# Altium PCB PCB1.PcbDoc
Units mm, origin at the board's own origin, x right, y up, seen from the top; angles counter-clockwise.
Board outline 100 x 20 mm, 2 copper layers (Top Layer, Bottom Layer), stack 1.535 mm thick; 28 components, 52 nets, 46 pads, 14 vias.
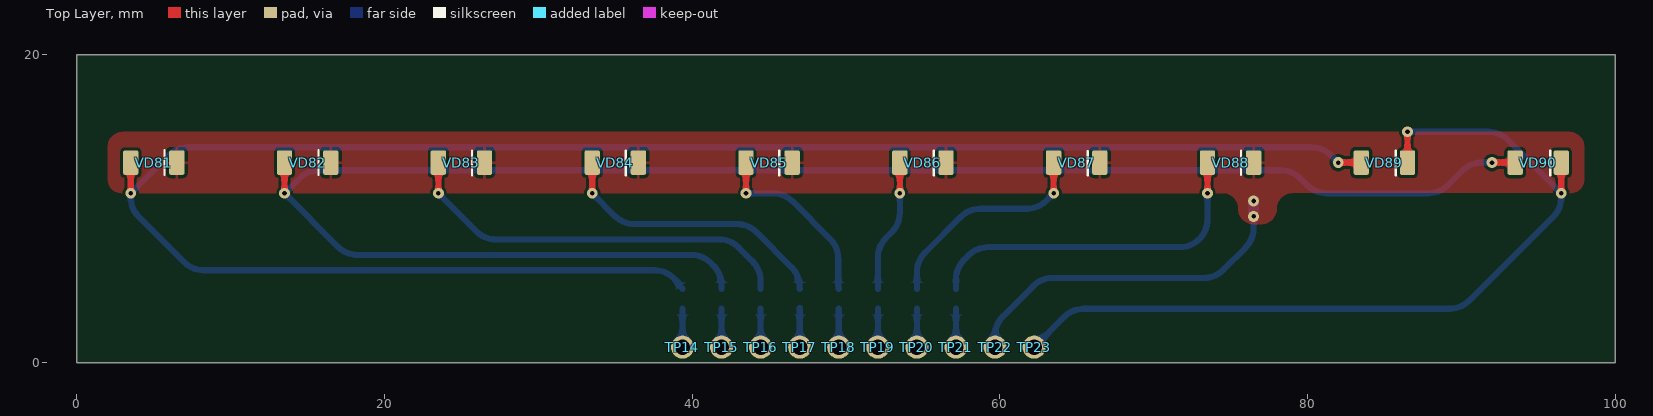
[diagram p0: Top Layer view]
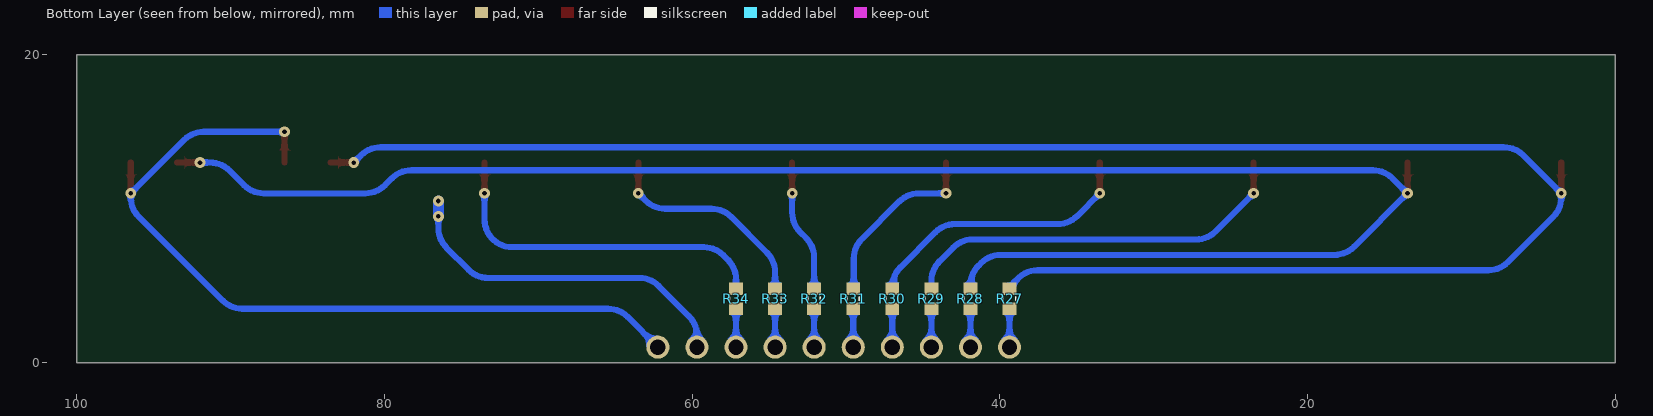
[diagram p1: Bottom Layer view, seen from below]
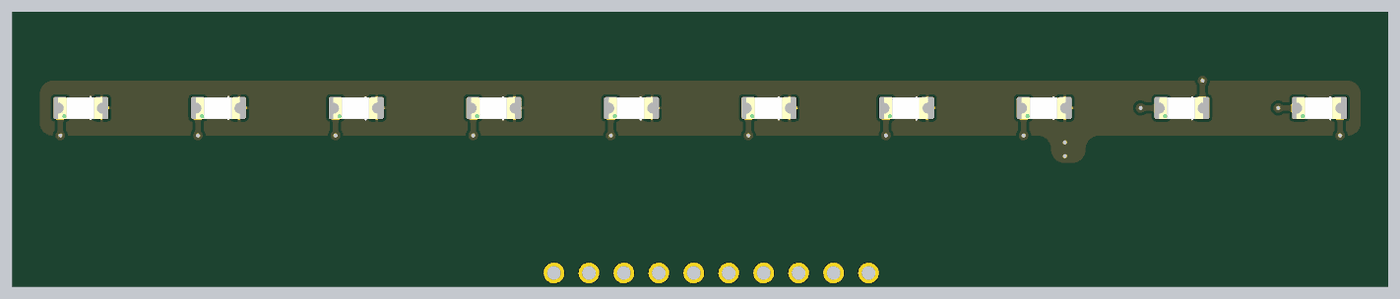
[diagram p2: 3D render of the assembled board from above, using the file's embedded part models]
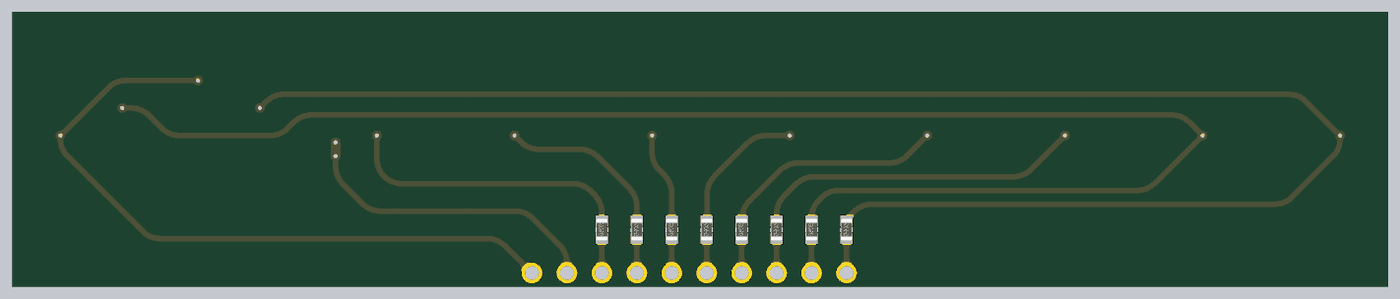
[diagram p3: 3D render of the assembled board from below, using the file's embedded part models]

## Layer stack, top to bottom
Top Solder: solder mask 0.0254, SM-001, Dk 4
Top Layer: signal copper 0.018
Dielectric 1: core 1.4986, Core-043, Dk 4.3
Bottom Layer: signal copper 0.018
Bottom Solder: solder mask 0.0254, SM-001, Dk 4

## Board outline
0,0 100,0 100,20 0,20

## Design rules (kind name [scope] priority, off if disabled: settings)
AcuteAngle [All] p1: minimum=3.50000000000000E+0001 checktracksonly=FALSE
BoardOutlineClearance "BoardOutlineClearance 1" [All] p1: gap=0.25 ignorepadtopadclearanceinfootprint=FALSE except(0: Arc-SplitContinuation Track-SplitContinuation SMDPad-SplitContinuation THPad-SplitContinuation Via-SplitContinuation Fill-SplitContinuation Poly-SplitContinuation Region-SplitContinuation Text-SplitContinuation) // Milling
BoardOutlineClearance "BoardOutlineClearance 2" [All] p2: gap=0.4 ignorepadtopadclearanceinfootprint=FALSE except(0: Arc-SplitContinuation Track-SplitContinuation SMDPad-SplitContinuation THPad-SplitContinuation Via-SplitContinuation Fill-SplitContinuation Poly-SplitContinuation Region-SplitContinuation Text-SplitContinuation) // V-Cut
Clearance "Clearance-1 1 Oz" [All] p1: gap=0.2 ignorepadtopadclearanceinfootprint=TRUE except(0.25: Arc-Hole Track-Hole SMDPad-Hole THPad-Hole Via-Hole Fill-Hole Poly-Hole Region-Hole Text-Hole) // Standart
Clearance "Clearance-1 1/2 Oz" [All] p2: gap=0.125 ignorepadtopadclearanceinfootprint=FALSE except(0.2: Arc-Fill Arc-Poly Track-Fill Track-Poly SMDPad-SMDPad SMDPad-Fill SMDPad-Poly THPad-Fill THPad-Poly Via-Fill Via-Poly Fill-Fill Fill-Poly Poly-Poly Poly-Region Poly-Text; 0.25: Arc-Hole Track-Hole SMDPad-Hole THPad-Hole Via-Hole Fill-Hole Poly-Hole Region-Hole Text-Hole) // Standart
ComponentClearance [All] p1: gap=0.254 collisioncheckmode=3 verticalgap=0.254 showdistances=FALSE donotcheckwithout3dbody=TRUE
DiffPairsRouting "DiffPairsRouting 1 Oz" [All] p1: maxlimit=0.254 minlimit=0.2 mostfreqgap=0.254 toplayer_minwidth=0.2 toplayer_maxwidth=0.381 toplayer_prefwidth=0.381 bottomlayer_minwidth=0.2 bottomlayer_maxwidth=0.381 bottomlayer_prefwidth=0.381 maxuncoupledlength=12.7
DiffPairsRouting "DiffPairsRouting 1/2 Oz" [All] p2: maxlimit=0.254 minlimit=0.1 mostfreqgap=0.254 toplayer_minwidth=0.1 toplayer_maxwidth=0.381 toplayer_prefwidth=0.381 bottomlayer_minwidth=0.1 bottomlayer_maxwidth=0.381 bottomlayer_prefwidth=0.381 maxuncoupledlength=12.7
HoleSize "Minimum HoleSize" [IsPad] p1: absolutevalues=TRUE maxlimit=5.9 minlimit=0.6 maxpercent=80.000 minpercent=20.000
HoleSize "Minimum HoleSize VIA 1" [IsVia] p2: absolutevalues=TRUE maxlimit=5.9 minlimit=0.3 maxpercent=80.000 minpercent=20.000 // Standart
HoleToHoleClearance Hole2HoleClearance [All] p1: gap=0.25 allowstackedmicrovias=FALSE
MinimumAnnularRing "Minimum AR VIA Standart" [IsVia] p1: minimumring=0.15
MinimumAnnularRing "Minimum AR PAD Standart" [IsPAD] p2: minimumring=0.2
MinimumAnnularRing "Minimum AR VIA Advance" [IsVia] p3: minimumring=0.1
MinimumAnnularRing "Minimum AR PAD Advance" [IsPAD] p4: minimumring=0.15
MinimumSolderMaskSliver "SolderMask Bridge Standart" [All] p1: minsoldermaskwidth=0.15 // All Masks
MinimumSolderMaskSliver "SolderMask Bridge Advance" [All] p2: minsoldermaskwidth=0.1 // Mask LDI
PlaneClearance "PlaneClearance 1 Oz" [All] p1: clearance=0.2
PlaneClearance "PlaneClearance-1 1/2 Oz" [All] p2: clearance=0.2 // Standart
PlaneConnect "TermalConnect-1 1 Oz" [All] p1: planeconnectstyle=Relief reliefexpansion=0.2 reliefentries=4 reliefconductorwidth=0.2 reliefairgap=0.2 // Standart
PolygonConnect "PolygonConnect-1 1 Oz" [All] p1: thpad.connectstyle=Relief thpad.reliefconductorwidth=0.2 thpad.reliefentries=4 thpad.polygonreliefangle="90 Angle" thpad.airgapwidth=0.2 smdpad.connectstyle=Relief smdpad.reliefconductorwidth=0.2 smdpad.reliefentries=4 smdpad.polygonreliefangle="90 Angle" smdpad.airgapwidth=0.2 via.connectstyle=Direct via.reliefconductorwidth=0.254 via.reliefentries=4 via.polygonreliefangle="90 Angle" via.airgapwidth=0.254 // Standart
PolygonConnect "PolygonConnect-1 1/2 Oz" [All] p2: thpad.connectstyle=Relief thpad.reliefconductorwidth=0.15 thpad.reliefentries=4 thpad.polygonreliefangle="90 Angle" thpad.airgapwidth=0.2 smdpad.connectstyle=Relief smdpad.reliefconductorwidth=0.2 smdpad.reliefentries=4 smdpad.polygonreliefangle="90 Angle" smdpad.airgapwidth=0.2 via.connectstyle=Direct via.reliefconductorwidth=0.254 via.reliefentries=4 via.polygonreliefangle="90 Angle" via.airgapwidth=0.254 // Standart
RoutingCorners [All] p1 off: cornerstyle=45-Degree minsetback=2.54 maxsetback=2.54
RoutingVias [All] p1: holewidth=0.3 width=0.6 viastyle="Through Hole" minholewidth=0.2 minwidth=0.4 maxholewidth=5.9 maxwidth=6.4
SilkToSilkClearance Silk2SilkClearance [All] p1 off: silktosilkclearance=0.15
SilkToSolderMaskClearance Silk2SolderMaskClearance [IsPad] p1 off: minsilkscreentomaskgap=0.15 clearancetoexposedcopper=TRUE
SolderMaskExpansion SolderMaskExpansion-1 [All] p1: expansion=0.05 istentingtop=FALSE // Standart
SolderMaskExpansion "SolderMaskExpansion LDI" [All] p2: expansion=0.025 istentingtop=FALSE // Advance
UnRoutedNet [All] p1: checkbadconnections=TRUE
Width "Width 1 Oz" [All] p1: maxlimit=10 minlimit=0.15 preferedwidth=0.2 checkconnectedcopper=TRUE
Width "Width 1/2 Oz" [All] p2: maxlimit=10 minlimit=0.1 preferedwidth=0.125 checkconnectedcopper=TRUE
19 further rules are at their usual default settings.

## Components (designator, comment, footprint, x,y, rotation, side; value= is the part's Value field where it differs from the comment)
R27 "Resistor film, 0R, , 0603, 0.1W, -55...+125°C" "RES: 0603" 39.37,4.15 r90 bottom value=0R
R28 "Resistor film, 0R, , 0603, 0.1W, -55...+125°C" "RES: 0603" 41.91,4.15 r90 bottom value=0R
R29 "Resistor film, 0R, , 0603, 0.1W, -55...+125°C" "RES: 0603" 44.45,4.15 r90 bottom value=0R
R30 "Resistor film, 0R, , 0603, 0.1W, -55...+125°C" "RES: 0603" 46.99,4.15 r90 bottom value=0R
R31 "Resistor film, 0R, , 0603, 0.1W, -55...+125°C" "RES: 0603" 49.53,4.15 r90 bottom value=0R
R32 "Resistor film, 0R, , 0603, 0.1W, -55...+125°C" "RES: 0603" 52.07,4.15 r90 bottom value=0R
R33 "Resistor film, 0R, , 0603, 0.1W, -55...+125°C" "RES: 0603" 54.61,4.15 r90 bottom value=0R
R34 "Resistor film, 0R, , 0603, 0.1W, -55...+125°C" "RES: 0603" 57.15,4.15 r90 bottom value=0R
TP14 "Testpoint_HS1mm" "TestPoint(without 3D)" 39.37,1 r0 top
TP15 "Testpoint_HS1mm" "TestPoint(without 3D)" 41.91,1 r0 top
TP16 "Testpoint_HS1mm" "TestPoint(without 3D)" 44.45,1 r0 top
TP17 "Testpoint_HS1mm" "TestPoint(without 3D)" 46.99,1 r0 top
TP18 "Testpoint_HS1mm" "TestPoint(without 3D)" 49.53,1 r0 top
TP19 "Testpoint_HS1mm" "TestPoint(without 3D)" 52.07,1 r0 top
TP20 "Testpoint_HS1mm" "TestPoint(without 3D)" 54.61,1 r0 top
TP21 "Testpoint_HS1mm" "TestPoint(without 3D)" 57.15,1 r0 top
TP22 "Testpoint_HS1mm" "TestPoint(without 3D)" 59.69,1 r0 top
TP23 "Testpoint_HS1mm" "TestPoint(without 3D)" 62.23,1 r0 top
VD81 "LED, Green, *, *, *, -55...+150°C" "LED: 1206Y" 5,13 r0 top
VD82 "LED, Green, *, *, *, -55...+150°C" "LED: 1206Y" 15,13 r0 top
VD83 "LED, Green, *, *, *, -55...+150°C" "LED: 1206Y" 25,13 r0 top
VD84 "LED, Green, *, *, *, -55...+150°C" "LED: 1206Y" 35,13 r0 top
VD85 "LED, Green, *, *, *, -55...+150°C" "LED: 1206Y" 45,13 r0 top
VD86 "LED, Green, *, *, *, -55...+150°C" "LED: 1206Y" 55,13 r0 top
VD87 "LED, Green, *, *, *, -55...+150°C" "LED: 1206Y" 65,13 r0 top
VD88 "LED, Green, *, *, *, -55...+150°C" "LED: 1206Y" 75,13 r0 top
VD89 "LED, Green, *, *, *, -55...+150°C" "LED: 1206Y" 85,13 r0 top
VD90 "LED, Green, *, *, *, -55...+150°C" "LED: 1206Y" 95,13 r0 top

## Footprints (in the part's own frame and the unit in brackets; to place one, negate y for a bottom-side part, rotate by r counter-clockwise, add the part's x,y. Pads: shape width x height; smd on the part's side, far side on the other; paste and mask are expansions set on the pad)
"LED: 1206Y" [mm]
  rrect25% 1x1.6 smd: 1(-1.5,0) 2(1.5,0)
  silkscreen extent 0.7,-0.8 0.7,0.8, body extent -1.65,-0.81 1.55,0.79, height 1.1
"RES: 0603" [mm]
  rect 0.8x0.9 smd: 1(-0.65,0) 2(0.65,0)
  silkscreen extent -0.13,-0.4 0.13,0.4, body extent -0.8,-0.4 0.8,0.4, height 0.44
"TestPoint(without 3D)" [mm]
  round 1.5 hole 1: 1(0,0)

## Part data
R27 R28 R29 R30 R31 R32 R33 R34: library part Resistor_0603, Manufacturer=Yageo, Package=0603, PartNumber=RC0603JR-07100RL, Power=0.1W, Temperature=-55...+125°C, TypeResistor="Resistor film", HelpURL=https://www.digikey.com/product-detail/en/yageo/RC0603JR-07100RL/311-100GRCT-ND/729644, ValueManufacturerPartNumber="Resistor film, 0R, , 0603, 0.1W, -55...+125°C"
VD81 VD82 VD83 VD84 VD85 VD86 VD87 VD88 VD89 VD90: library part LED_single, Color=GREEN, ColorParameter=Green, Temperature=-55...+150°C, TypeDiode=LED, ValueManufacturerPartNumber="LED, Green, *, *, *, -55...+150°C"

## Via types
v1: diameter 0.7, hole 0.3, Top Layer to Bottom Layer, tented both sides, 14 vias

## Nets (pads, with @x,y where several pads share a name; then routed paths per layer and width w, separated by ;. In a path a pad name is that pad's centre, name@x,y a point inside that pad or via, vN(x,y) a via of type N, cw(c..) or ccw(c..) an arc to the next point about the centre after c; other vN are vias at no path point)
NetR9_2: 
NetR10_2: 
NetR11_2: 
NetR12_2: 
NetR13_2: 
NetR14_2: 
NetR15_2: 
NetR16_2: 
NetR17_2: 
NetR18_2: 
NetR19_2: 
NetR20_2: 
NetR21_2: 
NetR22_2: 
NetR23_2: 
NetR24_2: 
NetR25_2: 
NetR26_2: 
NetR27_1: R27.1 TP14.1 | length 2.5
  Bottom Layer w0.4: TP14.1 R27.1
NetR27_2: R27.2 VD81.1 VD89.1 | length 122.3
  Top Layer w0.4: v1(3.5,11) VD81.1 ; v1(82,13) VD89.1
  Bottom Layer w0.4: R27.2 39.154,5 39.154,5.001 ccw(c37.542,4.2) 37.542,6 8.246,6 cw(c8.246,7.8) 6.974,6.526 4.026,9.474 cw(c5.3,10.746) 3.5,10.746 v1(3.5,11) 5.974,13.474 cw(c7.246,12.2) 7.246,14 80.254,14 cw(c80.254,12.2) 81.527,13.473 v1(82,13)
NetR28_1: R28.1 TP15.1 | length 2.5
  Bottom Layer w0.4: TP15.1 R28.1
NetR28_2: R28.2 VD82.1 VD90.1 | length 115
  Top Layer w0.4: v1(13.5,11) VD82.1 ; v1(92,13) VD90.1
  Bottom Layer w0.4: R28.2 41.91,5 41.91,5.032 ccw(c40.11,5.032) 41.381,6.307 41.217,6.471 ccw(c39.942,5.2) 39.942,7 18.246,7 cw(c18.246,8.8) 16.974,7.526 v1(13.5,11) 14.474,11.974 cw(c15.746,10.7) 15.746,12.5 78.254,12.5 cw(c78.254,10.7) 79.53,11.97 79.973,11.527 ccw(c81.246,12.8) 81.246,11 82.477,11 ccw(c82.477,12.8) 82.48,11 87.854,11 ccw(c87.854,12.8) 89.126,11.526 90.074,12.474 cw(c91.346,11.2) 91.346,13 v1(92,13)
NetR29_1: R29.1 TP16.1 | length 2.5
  Bottom Layer w0.4: TP16.1 R29.1
NetR29_2: R29.2 VD83.1 | length 26
  Top Layer w0.4: v1(23.5,11) VD83.1
  Bottom Layer w0.4: v1(23.5,11) 25.974,8.526 ccw(c27.246,9.8) 26.334,8.248 ccw(c27.246,9.8) 27.246,8 41.754,8 cw(c41.754,6.2) 43.029,7.471 43.921,6.579 cw(c42.65,5.304) 44.45,5.304 44.45,5 R29.2
NetR30_1: R30.1 TP17.1 | length 2.5
  Bottom Layer w0.4: TP17.1 R30.1@46.99,3.536
NetR30_2: R30.2 VD84.1 | length 18.3
  Top Layer w0.4: v1(33.5,11) VD84.1
  Bottom Layer w0.4: v1(33.5,11) 34.974,9.526 ccw(c36.246,10.8) 36.246,9 42.909,9 cw(c42.909,7.2) 44.185,8.469 46.457,6.198 cw(c45.184,4.925) 46.982,5.005 46.982,5 R30.2
NetR31_1: R31.1 TP18.1 | length 2.5
  Bottom Layer w0.4: TP18.1 R31.1
NetR31_2: R31.2 VD85.1 | length 12
  Top Layer w0.4: v1(43.5,11) VD85.1
  Bottom Layer w0.4: v1(43.5,11) 45.254,11 cw(c45.254,9.2) 46.529,10.471 48.971,8.029 cw(c47.7,6.754) 49.5,6.754 49.5,5 R31.2
NetR32_1: R32.1 TP19.1 | length 2.5
  Bottom Layer w0.4: TP19.1 R32.1
NetR32_2: R32.2 VD86.1 | length 8.6
  Top Layer w0.4: v1(53.5,11) VD86.1
  Bottom Layer w0.4: R32.2 52.07,6.824 cw(c53.87,6.824) 52.596,8.096 52.974,8.474 ccw(c51.7,9.746) 53.5,9.746 v1(53.5,11)
NetR33_1: R33.1 TP20.1 | length 2.5
  Bottom Layer w0.4: TP20.1 R33.1
NetR33_2: R33.2 VD87.1 | length 14.3
  Top Layer w0.4: v1(63.5,11) VD87.1
  Bottom Layer w0.4: R33.2 54.61,5.864 cw(c56.41,5.864) 55.136,7.136 57.474,9.474 cw(c58.746,8.2) 58.746,10 61.754,10 ccw(c61.754,11.8) 63.026,10.526 ; 63.026,10.526 v1@63.499,10.999
NetR34_1: R34.1 TP21.1 | length 2.5
  Bottom Layer w0.4: TP21.1 R34.1
NetR34_2: R34.2 VD88.1 | length 22.8
  Top Layer w0.4: v1(73.5,11) VD88.1
  Bottom Layer w0.4: R34.2 57.15,5.404 cw(c58.95,5.404) 57.676,6.676 57.974,6.974 cw(c59.246,5.7) 59.246,7.5 71.7,7.5 ccw(c71.7,9.3) 73.5,9.3 v1(73.5,11)
NetTP22_1: TP22.1 VD81.2 VD82.2 VD83.2 VD84.2 VD85.2 VD86.2 VD87.2 VD88.2 | length 22.8
  Bottom Layer w0.4: TP22.1 59.69,1.744 cw(c61.49,1.744) 60.216,3.016 62.174,4.974 cw(c63.446,3.7) 63.446,5.5 73.254,5.5 ccw(c73.254,7.3) 74.526,6.026 75.974,7.474 ccw(c74.7,8.746) 76.5,8.746 v1(76.5,9.5)
  Bottom Layer w0.7: v1(76.5,9.5) v1(76.5,10.5)
NetTP23_1: TP23.1 VD89.2 VD90.2 | length 54.3
  Top Layer w0.4: VD89.2 v1(86.5,15) ; v1(96.5,11) VD90.2
  Bottom Layer w0.4: TP23.1 64.204,2.974 cw(c65.476,1.7) 65.476,3.5 89.254,3.5 ccw(c89.254,5.3) 90.526,4.026 95.974,9.474 ccw(c94.7,10.746) 96.5,10.746 v1(96.5,11) cw(c97.769,12.276) 96.499,11.001 93.026,14.474 ccw(c91.754,13.2) 91.754,15 v1(86.5,15)
SR1: 
SR1_1: 
SR1_2: 
SR1_3: 
SR1_4: 
SR1_5: 
SR1_6: 
SR1_7: 
SR1_8: 
SR2: 
SR3: 
SR4: 
SR5: 
SR6: 
SR7: 
SR8: 

## Polygon pours and split planes (outlines as drawn)
NetTP22_1 on Top Layer "NONET_L01_P-001" (solid, pour order 0): 78,10 cw(c79,10) 79,11 97.05,11 ccw(c97.05,11.95) 98,11.95 98,14 ccw(c97,14) 97,15 77,15 3,15 ccw(c3,14) 2,14 2,12 2,11.95 ccw(c2.95,11.95) 2.95,11 74.5,11 cw(c74.5,10) 75.5,10 ccw(c76.5,10) 76.5,9 77,9 ccw(c77,10)

## Silkscreen, mask and mechanical layers (free items; w line width, h text height)
Board:
  the board outline again, w0.15